# Altium PCB OPAMP_TESTERh.PcbDoc (part 1 of 2)
Units mil, origin at the board's own origin, x right, y up, seen from the top; angles counter-clockwise.
Board outline 10340.03 x 6170.03 mil, 2 copper layers (Top Layer, Bottom Layer); 210 components, 0 nets, 1610 pads, 0 vias.
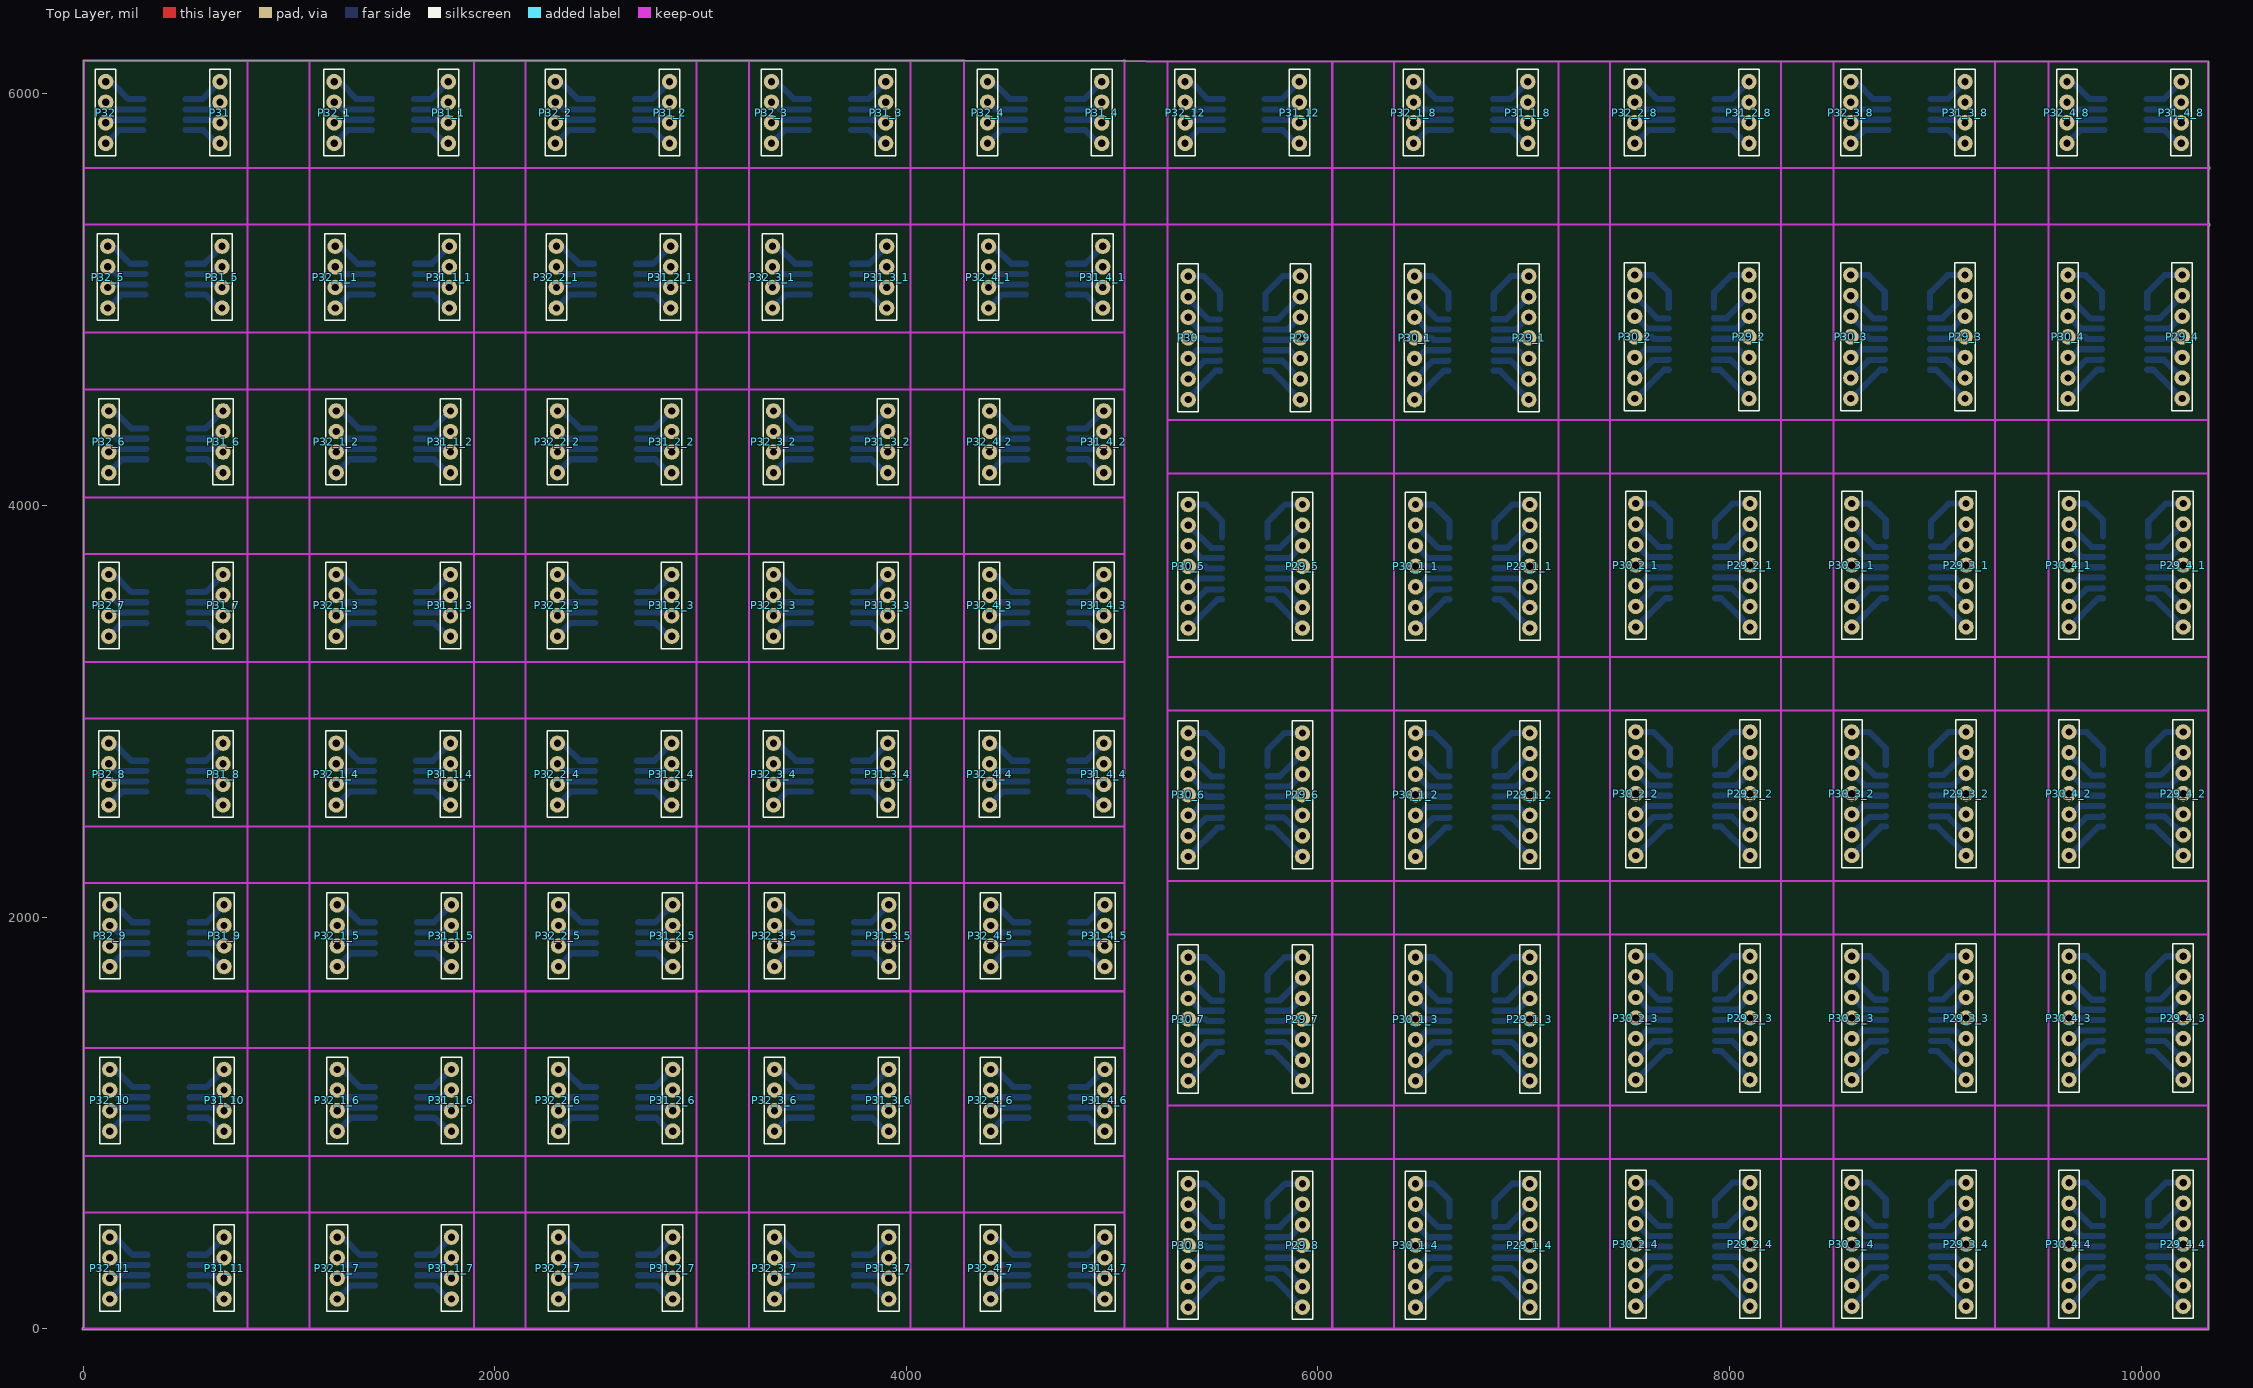
[diagram p0: Top Layer view]
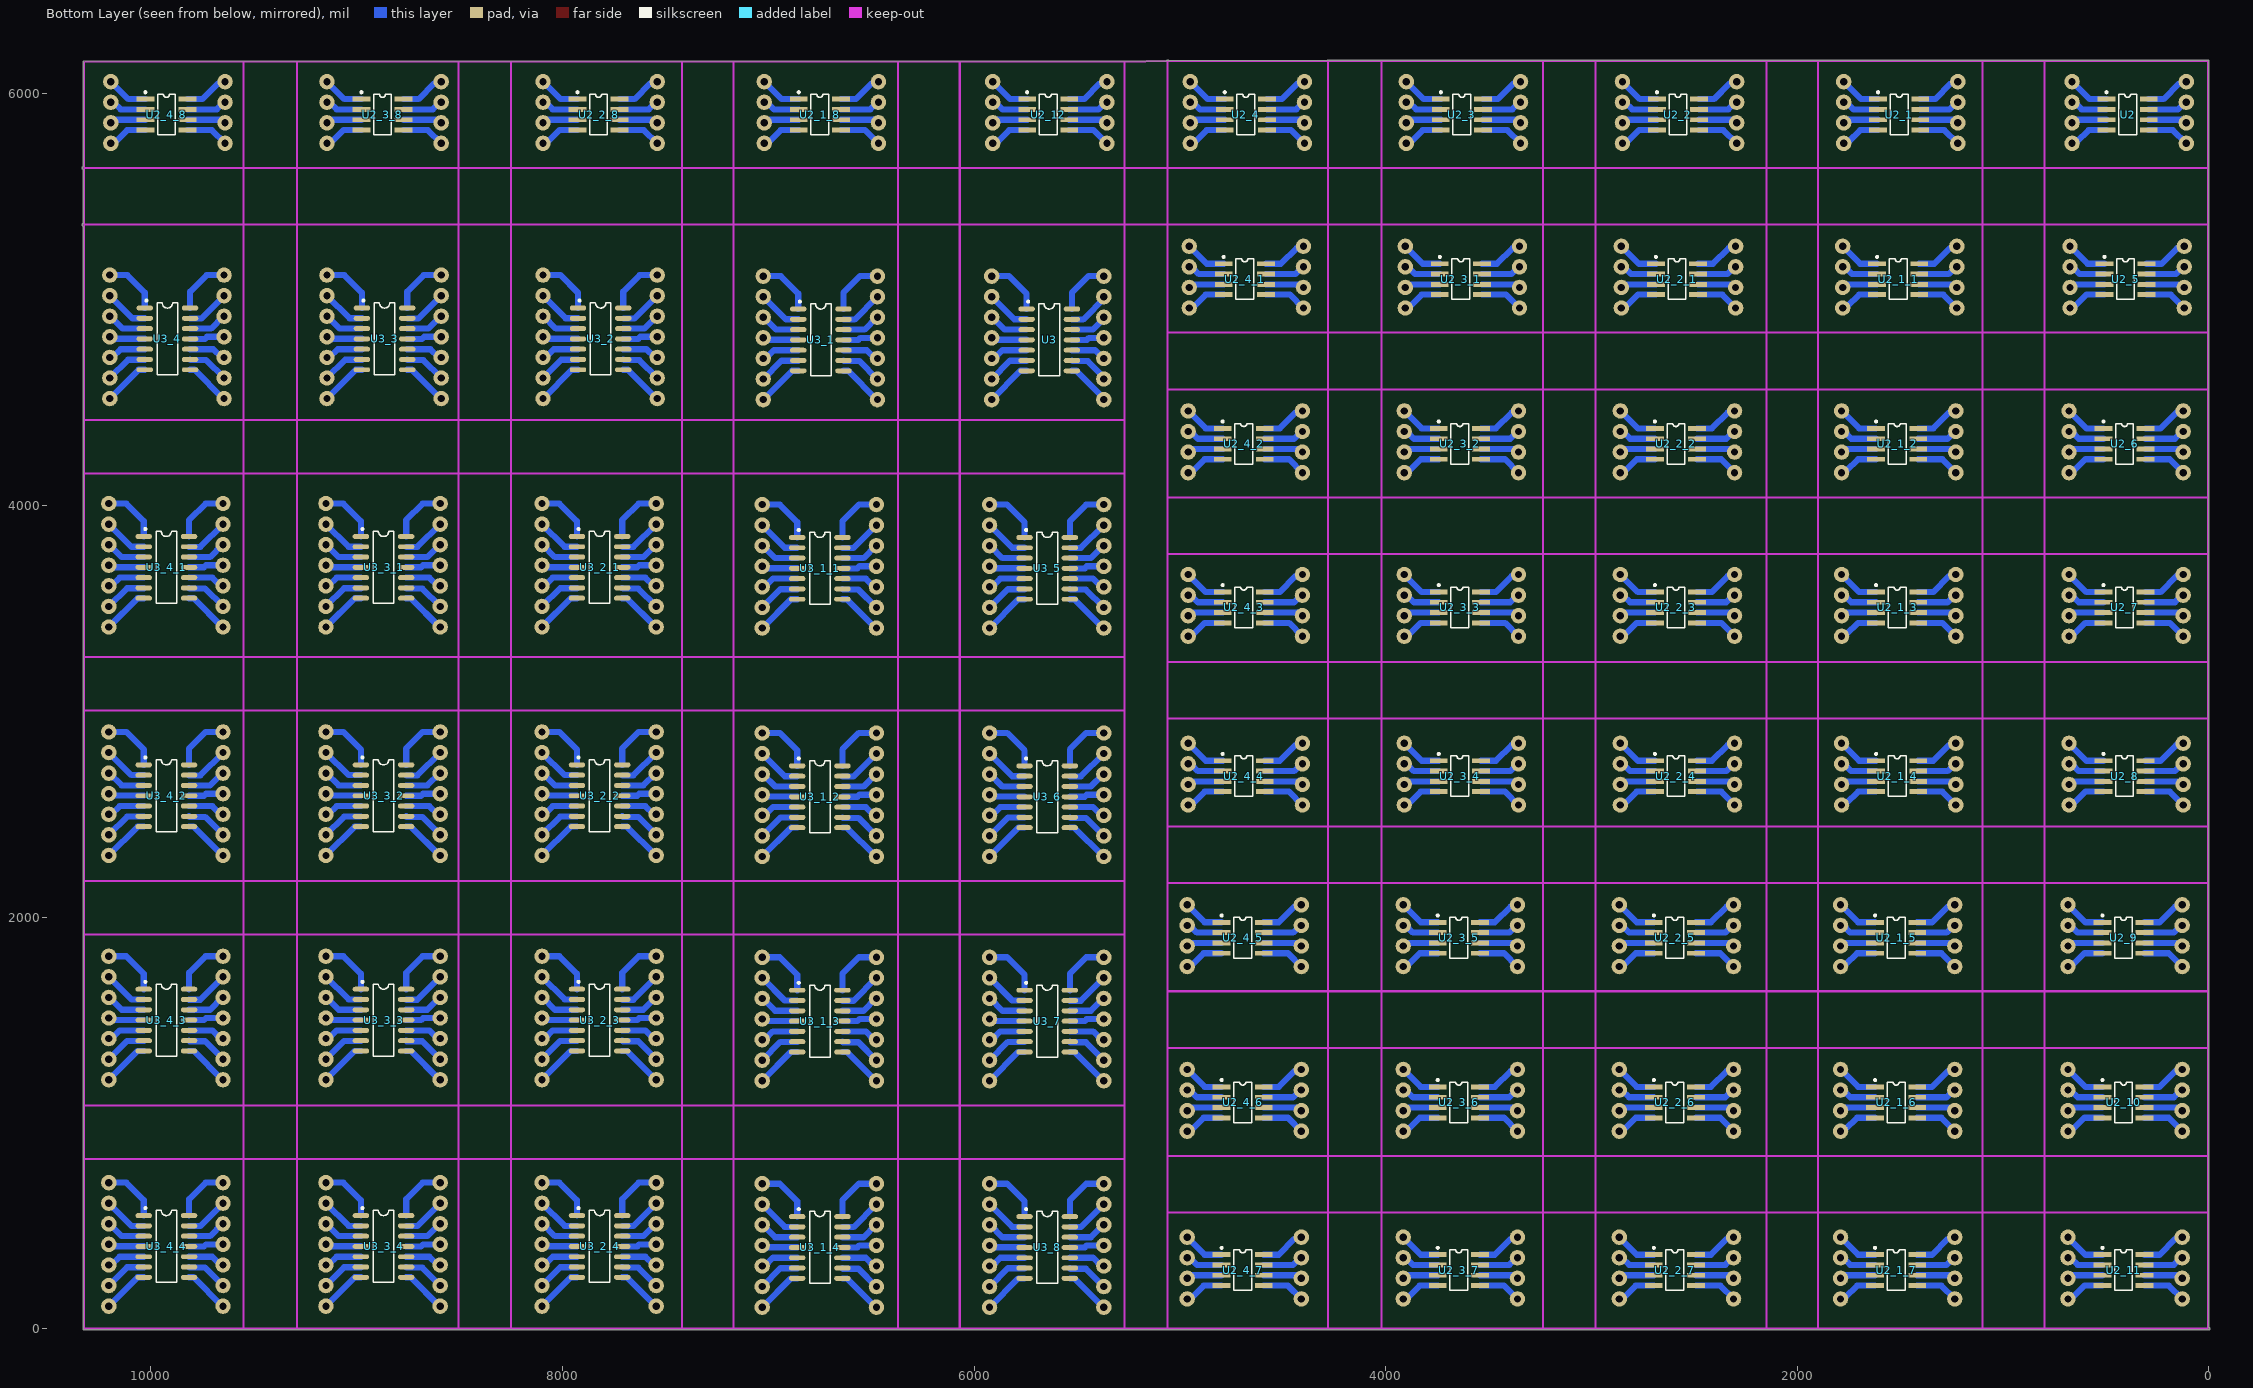
[diagram p1: Bottom Layer view, seen from below]

## Layer stack, top to bottom
Top Solder: solder mask 0.4, Solder Resist, Dk 3.5
Top Layer: signal copper 1.4
Dielectric 1: dielectric 12.6, FR-4, Dk 4.8
Bottom Layer: signal copper 1.4
Bottom Solder: solder mask 0.4, Solder Resist, Dk 3.5

## Board outline
-0.01,5.01 ccw(c0,0) 0,-5.02 10325,-5.02 ccw(c10325,0) 10330.02,0 10330.01,5359.99 ccw(c10330,5365) 10335.01,5365 ccw(c10330,5365) 10330.01,5370.02 10330.01,5634.99 ccw(c10330,5640) 10335.01,5640 ccw(c10330,5640) 10330.01,5645.02 10330.01,6154.98 ccw(c10325,6154.98) 10325,6160 5064.31,6162.56 ccw(c5060,6160) 5055.69,6162.56 4284.07,6162.93 ccw(c4280,6160) 4275.93,6162.94 4023.97,6163.06 ccw(c4020,6160) 4016.03,6163.06 3238.65,6163.44 ccw(c3235,6160) 3231.36,6163.45 2983.52,6163.57 ccw(c2980,6160) 2976.48,6163.57 2153.06,6163.97 ccw(c2150,6160) 2146.94,6163.97 1902.9,6164.09 ccw(c1900,6160) 1897.1,6164.1 1102.25,6164.48 1097.75,6164.48 801.93,6164.63 798.07,6164.63 5.03,6165.01 ccw(c5,6160) -0.02,6160

## Design rules (kind name [scope] priority, off if disabled: settings)
Clearance [All] p1: gap=10 ignorepadtopadclearanceinfootprint=FALSE except(0: Arc-Hole Track-Hole SMDPad-Hole THPad-Hole Via-Hole Fill-Hole Poly-Hole Region-Hole Text-Hole)
PolygonConnect [All] p1: connectstyle=Relief reliefconductorwidth=10 reliefentries=4 polygonreliefangle="90 Angle" airgapwidth=10
RoutingVias [All] p1: holewidth=28 width=50 viastyle="Through Hole" minholewidth=28 minwidth=50 maxholewidth=28 maxwidth=50
SolderMaskExpansion [All] p1: expansion=4 istentingtop=FALSE
Width [All] p1: maxlimit=10 minlimit=10 preferedwidth=10
30 further rules are at their usual default settings.

## Components (designator, comment, footprint, x,y, rotation, side; value= is the part's Value field where it differs from the comment)
P29 "LM324" "CON HDR 2.54FM 7" 5915,5115 r270 top locked
P29_1 "LM324" "CON HDR 2.54FM 7" 7025,5115 r270 top locked (schematic designator P29)
P29_1_1 "LM324" "CON HDR 2.54FM 7" 7030,4005 r270 top locked (schematic designator P29)
P29_1_2 "LM324" "CON HDR 2.54FM 7" 7030,2895 r270 top locked (schematic designator P29)
P29_1_3 "LM324" "CON HDR 2.54FM 7" 7030,1805 r270 top locked (schematic designator P29)
P29_1_4 "LM324" "CON HDR 2.54FM 7" 7030,705 r270 top locked (schematic designator P29)
P29_2 "LM324" "CON HDR 2.54FM 7" 8095,5120 r270 top locked (schematic designator P29)
P29_2_1 "LM324" "CON HDR 2.54FM 7" 8100,4010 r270 top locked (schematic designator P29)
P29_2_2 "LM324" "CON HDR 2.54FM 7" 8100,2900 r270 top locked (schematic designator P29)
P29_2_3 "LM324" "CON HDR 2.54FM 7" 8100,1810 r270 top locked (schematic designator P29)
P29_2_4 "LM324" "CON HDR 2.54FM 7" 8100,710 r270 top locked (schematic designator P29)
P29_3 "LM324" "CON HDR 2.54FM 7" 9145,5120 r270 top locked (schematic designator P29)
P29_3_1 "LM324" "CON HDR 2.54FM 7" 9150,4010 r270 top locked (schematic designator P29)
P29_3_2 "LM324" "CON HDR 2.54FM 7" 9150,2900 r270 top locked (schematic designator P29)
P29_3_3 "LM324" "CON HDR 2.54FM 7" 9150,1810 r270 top locked (schematic designator P29)
P29_3_4 "LM324" "CON HDR 2.54FM 7" 9150,710 r270 top locked (schematic designator P29)
P29_4 "LM324" "CON HDR 2.54FM 7" 10200,5120 r270 top locked (schematic designator P29)
P29_4_1 "LM324" "CON HDR 2.54FM 7" 10205,4010 r270 top locked (schematic designator P29)
P29_4_2 "LM324" "CON HDR 2.54FM 7" 10205,2900 r270 top locked (schematic designator P29)
P29_4_3 "LM324" "CON HDR 2.54FM 7" 10205,1810 r270 top locked (schematic designator P29)
P29_4_4 "LM324" "CON HDR 2.54FM 7" 10205,710 r270 top locked (schematic designator P29)
P29_5 "LM324" "CON HDR 2.54FM 7" 5925,4005 r270 top locked (schematic designator P29)
P29_6 "LM324" "CON HDR 2.54FM 7" 5925,2895 r270 top locked (schematic designator P29)
P29_7 "LM324" "CON HDR 2.54FM 7" 5925,1805 r270 top locked (schematic designator P29)
P29_8 "LM324" "CON HDR 2.54FM 7" 5925,705 r270 top locked (schematic designator P29)
P30 "LM324" "CON HDR 2.54FM 7" 5370,4515 r90 top locked
P30_1 "LM324" "CON HDR 2.54FM 7" 6470,4515 r90 top locked (schematic designator P30)
P30_1_1 "LM324" "CON HDR 2.54FM 7" 6475,3405 r90 top locked (schematic designator P30)
P30_1_2 "LM324" "CON HDR 2.54FM 7" 6475,2295 r90 top locked (schematic designator P30)
P30_1_3 "LM324" "CON HDR 2.54FM 7" 6475,1205 r90 top locked (schematic designator P30)
P30_1_4 "LM324" "CON HDR 2.54FM 7" 6475,105 r90 top locked (schematic designator P30)
P30_2 "LM324" "CON HDR 2.54FM 7" 7540,4520 r90 top locked (schematic designator P30)
P30_2_1 "LM324" "CON HDR 2.54FM 7" 7545,3410 r90 top locked (schematic designator P30)
P30_2_2 "LM324" "CON HDR 2.54FM 7" 7545,2300 r90 top locked (schematic designator P30)
P30_2_3 "LM324" "CON HDR 2.54FM 7" 7545,1210 r90 top locked (schematic designator P30)
P30_2_4 "LM324" "CON HDR 2.54FM 7" 7545,110 r90 top locked (schematic designator P30)
P30_3 "LM324" "CON HDR 2.54FM 7" 8590,4520 r90 top locked (schematic designator P30)
P30_3_1 "LM324" "CON HDR 2.54FM 7" 8595,3410 r90 top locked (schematic designator P30)
P30_3_2 "LM324" "CON HDR 2.54FM 7" 8595,2300 r90 top locked (schematic designator P30)
P30_3_3 "LM324" "CON HDR 2.54FM 7" 8595,1210 r90 top locked (schematic designator P30)
P30_3_4 "LM324" "CON HDR 2.54FM 7" 8595,110 r90 top locked (schematic designator P30)
P30_4 "LM324" "CON HDR 2.54FM 7" 9645,4520 r90 top locked (schematic designator P30)
P30_4_1 "LM324" "CON HDR 2.54FM 7" 9650,3410 r90 top locked (schematic designator P30)
P30_4_2 "LM324" "CON HDR 2.54FM 7" 9650,2300 r90 top locked (schematic designator P30)
P30_4_3 "LM324" "CON HDR 2.54FM 7" 9650,1210 r90 top locked (schematic designator P30)
P30_4_4 "LM324" "CON HDR 2.54FM 7" 9650,110 r90 top locked (schematic designator P30)
P30_5 "LM324" "CON HDR 2.54FM 7" 5370,3405 r90 top locked (schematic designator P30)
P30_6 "LM324" "CON HDR 2.54FM 7" 5370,2295 r90 top locked (schematic designator P30)
P30_7 "LM324" "CON HDR 2.54FM 7" 5370,1205 r90 top locked (schematic designator P30)
P30_8 "LM324" "CON HDR 2.54FM 7" 5370,105 r90 top locked (schematic designator P30)
P31 "LM358" "CON HDR 2.54FM 4" 665,6060 r270 top locked
P31_1 "LM358" "CON HDR 2.54FM 4" 1775,6060 r270 top locked (schematic designator P31)
P31_1_1 "LM358" "CON HDR 2.54FM 4" 1780,5260 r270 top locked (schematic designator P31)
P31_1_2 "LM358" "CON HDR 2.54FM 4" 1785,4460 r270 top locked (schematic designator P31)
P31_1_3 "LM358" "CON HDR 2.54FM 4" 1785,3665 r270 top locked (schematic designator P31)
P31_1_4 "LM358" "CON HDR 2.54FM 4" 1785,2845 r270 top locked (schematic designator P31)
P31_1_5 "LM358" "CON HDR 2.54FM 4" 1790,2060 r270 top locked (schematic designator P31)
P31_1_6 "LM358" "CON HDR 2.54FM 4" 1790,1260 r270 top locked (schematic designator P31)
P31_1_7 "LM358" "CON HDR 2.54FM 4" 1790,445 r270 top locked (schematic designator P31)
P31_1_8 "LM358" "CON HDR 2.54FM 4" 7020,6060 r270 top locked (schematic designator P31)
P31_2 "LM358" "CON HDR 2.54FM 4" 2850,6060 r270 top locked (schematic designator P31)
P31_2_1 "LM358" "CON HDR 2.54FM 4" 2855,5260 r270 top locked (schematic designator P31)
P31_2_2 "LM358" "CON HDR 2.54FM 4" 2860,4460 r270 top locked (schematic designator P31)
P31_2_3 "LM358" "CON HDR 2.54FM 4" 2860,3665 r270 top locked (schematic designator P31)
P31_2_4 "LM358" "CON HDR 2.54FM 4" 2860,2845 r270 top locked (schematic designator P31)
P31_2_5 "LM358" "CON HDR 2.54FM 4" 2865,2060 r270 top locked (schematic designator P31)
P31_2_6 "LM358" "CON HDR 2.54FM 4" 2865,1260 r270 top locked (schematic designator P31)
P31_2_7 "LM358" "CON HDR 2.54FM 4" 2865,445 r270 top locked (schematic designator P31)
P31_2_8 "LM358" "CON HDR 2.54FM 4" 8095,6060 r270 top locked (schematic designator P31)
P31_3 "LM358" "CON HDR 2.54FM 4" 3900,6060 r270 top locked (schematic designator P31)
P31_3_1 "LM358" "CON HDR 2.54FM 4" 3905,5260 r270 top locked (schematic designator P31)
P31_3_2 "LM358" "CON HDR 2.54FM 4" 3910,4460 r270 top locked (schematic designator P31)
P31_3_3 "LM358" "CON HDR 2.54FM 4" 3910,3665 r270 top locked (schematic designator P31)
P31_3_4 "LM358" "CON HDR 2.54FM 4" 3910,2845 r270 top locked (schematic designator P31)
P31_3_5 "LM358" "CON HDR 2.54FM 4" 3915,2060 r270 top locked (schematic designator P31)
P31_3_6 "LM358" "CON HDR 2.54FM 4" 3915,1260 r270 top locked (schematic designator P31)
P31_3_7 "LM358" "CON HDR 2.54FM 4" 3915,445 r270 top locked (schematic designator P31)
P31_3_8 "LM358" "CON HDR 2.54FM 4" 9145,6060 r270 top locked (schematic designator P31)
P31_4 "LM358" "CON HDR 2.54FM 4" 4950,6060 r270 top locked (schematic designator P31)
P31_4_1 "LM358" "CON HDR 2.54FM 4" 4955,5260 r270 top locked (schematic designator P31)
P31_4_2 "LM358" "CON HDR 2.54FM 4" 4960,4460 r270 top locked (schematic designator P31)
P31_4_3 "LM358" "CON HDR 2.54FM 4" 4960,3665 r270 top locked (schematic designator P31)
P31_4_4 "LM358" "CON HDR 2.54FM 4" 4960,2845 r270 top locked (schematic designator P31)
P31_4_5 "LM358" "CON HDR 2.54FM 4" 4965,2060 r270 top locked (schematic designator P31)
P31_4_6 "LM358" "CON HDR 2.54FM 4" 4965,1260 r270 top locked (schematic designator P31)
P31_4_7 "LM358" "CON HDR 2.54FM 4" 4965,445 r270 top locked (schematic designator P31)
P31_4_8 "LM358" "CON HDR 2.54FM 4" 10195,6060 r270 top locked (schematic designator P31)
P31_5 "LM358" "CON HDR 2.54FM 4" 675,5260 r270 top locked (schematic designator P31)
P31_6 "LM358" "CON HDR 2.54FM 4" 680,4460 r270 top locked (schematic designator P31)
P31_7 "LM358" "CON HDR 2.54FM 4" 680,3665 r270 top locked (schematic designator P31)
P31_8 "LM358" "CON HDR 2.54FM 4" 680,2845 r270 top locked (schematic designator P31)
P31_9 "LM358" "CON HDR 2.54FM 4" 685,2060 r270 top locked (schematic designator P31)
P31_10 "LM358" "CON HDR 2.54FM 4" 685,1260 r270 top locked (schematic designator P31)
P31_11 "LM358" "CON HDR 2.54FM 4" 685,445 r270 top locked (schematic designator P31)
P31_12 "LM358" "CON HDR 2.54FM 4" 5910,6060 r270 top locked (schematic designator P31)
P32 "LM358" "CON HDR 2.54FM 4" 110,5760 r90 top locked
P32_1 "LM358" "CON HDR 2.54FM 4" 1220,5760 r90 top locked (schematic designator P32)
P32_1_1 "LM358" "CON HDR 2.54FM 4" 1225,4960 r90 top locked (schematic designator P32)
P32_1_2 "LM358" "CON HDR 2.54FM 4" 1230,4160 r90 top locked (schematic designator P32)
P32_1_3 "LM358" "CON HDR 2.54FM 4" 1230,3365 r90 top locked (schematic designator P32)
P32_1_4 "LM358" "CON HDR 2.54FM 4" 1230,2545 r90 top locked (schematic designator P32)
P32_1_5 "LM358" "CON HDR 2.54FM 4" 1235,1760 r90 top locked (schematic designator P32)
P32_1_6 "LM358" "CON HDR 2.54FM 4" 1235,960 r90 top locked (schematic designator P32)
P32_1_7 "LM358" "CON HDR 2.54FM 4" 1235,145 r90 top locked (schematic designator P32)
P32_1_8 "LM358" "CON HDR 2.54FM 4" 6465,5760 r90 top locked (schematic designator P32)
P32_2 "LM358" "CON HDR 2.54FM 4" 2295,5760 r90 top locked (schematic designator P32)
P32_2_1 "LM358" "CON HDR 2.54FM 4" 2300,4960 r90 top locked (schematic designator P32)
P32_2_2 "LM358" "CON HDR 2.54FM 4" 2305,4160 r90 top locked (schematic designator P32)
P32_2_3 "LM358" "CON HDR 2.54FM 4" 2305,3365 r90 top locked (schematic designator P32)
P32_2_4 "LM358" "CON HDR 2.54FM 4" 2305,2545 r90 top locked (schematic designator P32)
P32_2_5 "LM358" "CON HDR 2.54FM 4" 2310,1760 r90 top locked (schematic designator P32)
P32_2_6 "LM358" "CON HDR 2.54FM 4" 2310,960 r90 top locked (schematic designator P32)
P32_2_7 "LM358" "CON HDR 2.54FM 4" 2310,145 r90 top locked (schematic designator P32)
P32_2_8 "LM358" "CON HDR 2.54FM 4" 7540,5760 r90 top locked (schematic designator P32)
P32_3 "LM358" "CON HDR 2.54FM 4" 3345,5760 r90 top locked (schematic designator P32)
P32_3_1 "LM358" "CON HDR 2.54FM 4" 3350,4960 r90 top locked (schematic designator P32)
P32_3_2 "LM358" "CON HDR 2.54FM 4" 3355,4160 r90 top locked (schematic designator P32)
P32_3_3 "LM358" "CON HDR 2.54FM 4" 3355,3365 r90 top locked (schematic designator P32)
P32_3_4 "LM358" "CON HDR 2.54FM 4" 3355,2545 r90 top locked (schematic designator P32)
P32_3_5 "LM358" "CON HDR 2.54FM 4" 3360,1760 r90 top locked (schematic designator P32)
P32_3_6 "LM358" "CON HDR 2.54FM 4" 3360,960 r90 top locked (schematic designator P32)
P32_3_7 "LM358" "CON HDR 2.54FM 4" 3360,145 r90 top locked (schematic designator P32)
P32_3_8 "LM358" "CON HDR 2.54FM 4" 8590,5760 r90 top locked (schematic designator P32)
P32_4 "LM358" "CON HDR 2.54FM 4" 4395,5760 r90 top locked (schematic designator P32)
P32_4_1 "LM358" "CON HDR 2.54FM 4" 4400,4960 r90 top locked (schematic designator P32)
P32_4_2 "LM358" "CON HDR 2.54FM 4" 4405,4160 r90 top locked (schematic designator P32)
P32_4_3 "LM358" "CON HDR 2.54FM 4" 4405,3365 r90 top locked (schematic designator P32)
P32_4_4 "LM358" "CON HDR 2.54FM 4" 4405,2545 r90 top locked (schematic designator P32)
P32_4_5 "LM358" "CON HDR 2.54FM 4" 4410,1760 r90 top locked (schematic designator P32)
P32_4_6 "LM358" "CON HDR 2.54FM 4" 4410,960 r90 top locked (schematic designator P32)
P32_4_7 "LM358" "CON HDR 2.54FM 4" 4410,145 r90 top locked (schematic designator P32)
P32_4_8 "LM358" "CON HDR 2.54FM 4" 9640,5760 r90 top locked (schematic designator P32)
P32_5 "LM358" "CON HDR 2.54FM 4" 120,4960 r90 top locked (schematic designator P32)
P32_6 "LM358" "CON HDR 2.54FM 4" 125,4160 r90 top locked (schematic designator P32)
P32_7 "LM358" "CON HDR 2.54FM 4" 125,3365 r90 top locked (schematic designator P32)
P32_8 "LM358" "CON HDR 2.54FM 4" 125,2545 r90 top locked (schematic designator P32)
P32_9 "LM358" "CON HDR 2.54FM 4" 130,1760 r90 top locked (schematic designator P32)
P32_10 "LM358" "CON HDR 2.54FM 4" 130,960 r90 top locked (schematic designator P32)
P32_11 "LM358" "CON HDR 2.54FM 4" 130,145 r90 top locked (schematic designator P32)
P32_12 "LM358" "CON HDR 2.54FM 4" 5355,5760 r90 top locked (schematic designator P32)
U2 "IC LM358" "SMD IC SOP8" 395,5900 r270 bottom locked
U2_1 "IC LM358" "SMD IC SOP8" 1505,5900 r270 bottom locked (schematic designator U2)
U2_1_1 "IC LM358" "SMD IC SOP8" 1510,5100 r270 bottom locked (schematic designator U2)
U2_1_2 "IC LM358" "SMD IC SOP8" 1515,4300 r270 bottom locked (schematic designator U2)
U2_1_3 "IC LM358" "SMD IC SOP8" 1515,3505 r270 bottom locked (schematic designator U2)
U2_1_4 "IC LM358" "SMD IC SOP8" 1515,2685 r270 bottom locked (schematic designator U2)
U2_1_5 "IC LM358" "SMD IC SOP8" 1520,1900 r270 bottom locked (schematic designator U2)
U2_1_6 "IC LM358" "SMD IC SOP8" 1520,1100 r270 bottom locked (schematic designator U2)
U2_1_7 "IC LM358" "SMD IC SOP8" 1520,285 r270 bottom locked (schematic designator U2)
U2_1_8 "IC LM358" "SMD IC SOP8" 6750,5900 r270 bottom locked (schematic designator U2)
U2_2 "IC LM358" "SMD IC SOP8" 2580,5900 r270 bottom locked (schematic designator U2)
U2_2_1 "IC LM358" "SMD IC SOP8" 2585,5100 r270 bottom locked (schematic designator U2)
U2_2_2 "IC LM358" "SMD IC SOP8" 2590,4300 r270 bottom locked (schematic designator U2)
U2_2_3 "IC LM358" "SMD IC SOP8" 2590,3505 r270 bottom locked (schematic designator U2)
U2_2_4 "IC LM358" "SMD IC SOP8" 2590,2685 r270 bottom locked (schematic designator U2)
U2_2_5 "IC LM358" "SMD IC SOP8" 2595,1900 r270 bottom locked (schematic designator U2)
U2_2_6 "IC LM358" "SMD IC SOP8" 2595,1100 r270 bottom locked (schematic designator U2)
U2_2_7 "IC LM358" "SMD IC SOP8" 2595,285 r270 bottom locked (schematic designator U2)
U2_2_8 "IC LM358" "SMD IC SOP8" 7825,5900 r270 bottom locked (schematic designator U2)
U2_3 "IC LM358" "SMD IC SOP8" 3630,5900 r270 bottom locked (schematic designator U2)
U2_3_1 "IC LM358" "SMD IC SOP8" 3635,5100 r270 bottom locked (schematic designator U2)
U2_3_2 "IC LM358" "SMD IC SOP8" 3640,4300 r270 bottom locked (schematic designator U2)
U2_3_3 "IC LM358" "SMD IC SOP8" 3640,3505 r270 bottom locked (schematic designator U2)
U2_3_4 "IC LM358" "SMD IC SOP8" 3640,2685 r270 bottom locked (schematic designator U2)
U2_3_5 "IC LM358" "SMD IC SOP8" 3645,1900 r270 bottom locked (schematic designator U2)
U2_3_6 "IC LM358" "SMD IC SOP8" 3645,1100 r270 bottom locked (schematic designator U2)
U2_3_7 "IC LM358" "SMD IC SOP8" 3645,285 r270 bottom locked (schematic designator U2)
U2_3_8 "IC LM358" "SMD IC SOP8" 8875,5900 r270 bottom locked (schematic designator U2)
U2_4 "IC LM358" "SMD IC SOP8" 4680,5900 r270 bottom locked (schematic designator U2)
U2_4_1 "IC LM358" "SMD IC SOP8" 4685,5100 r270 bottom locked (schematic designator U2)
U2_4_2 "IC LM358" "SMD IC SOP8" 4690,4300 r270 bottom locked (schematic designator U2)
U2_4_3 "IC LM358" "SMD IC SOP8" 4690,3505 r270 bottom locked (schematic designator U2)
U2_4_4 "IC LM358" "SMD IC SOP8" 4690,2685 r270 bottom locked (schematic designator U2)
U2_4_5 "IC LM358" "SMD IC SOP8" 4695,1900 r270 bottom locked (schematic designator U2)
U2_4_6 "IC LM358" "SMD IC SOP8" 4695,1100 r270 bottom locked (schematic designator U2)
U2_4_7 "IC LM358" "SMD IC SOP8" 4695,285 r270 bottom locked (schematic designator U2)
U2_4_8 "IC LM358" "SMD IC SOP8" 9925,5900 r270 bottom locked (schematic designator U2)
U2_5 "IC LM358" "SMD IC SOP8" 405,5100 r270 bottom locked (schematic designator U2)
U2_6 "IC LM358" "SMD IC SOP8" 410,4300 r270 bottom locked (schematic designator U2)
U2_7 "IC LM358" "SMD IC SOP8" 410,3505 r270 bottom locked (schematic designator U2)
U2_8 "IC LM358" "SMD IC SOP8" 410,2685 r270 bottom locked (schematic designator U2)
U2_9 "IC LM358" "SMD IC SOP8" 415,1900 r270 bottom locked (schematic designator U2)
U2_10 "IC LM358" "SMD IC SOP8" 415,1100 r270 bottom locked (schematic designator U2)
U2_11 "IC LM358" "SMD IC SOP8" 415,285 r270 bottom locked (schematic designator U2)
U2_12 "IC LM358" "SMD IC SOP8" 5640,5900 r270 bottom locked (schematic designator U2)
U3 "IC LM324" "SMD IC SOP14" 5635,4805 r270 bottom locked
U3_1 "IC LM324" "SMD IC SOP14" 6745,4805 r270 bottom locked (schematic designator U3)
U3_1_1 "IC LM324" "SMD IC SOP14" 6750,3695 r270 bottom locked (schematic designator U3)
U3_1_2 "IC LM324" "SMD IC SOP14" 6750,2585 r270 bottom locked (schematic designator U3)
U3_1_3 "IC LM324" "SMD IC SOP14" 6750,1495 r270 bottom locked (schematic designator U3)
U3_1_4 "IC LM324" "SMD IC SOP14" 6750,395 r270 bottom locked (schematic designator U3)
U3_2 "IC LM324" "SMD IC SOP14" 7815,4810 r270 bottom locked (schematic designator U3)
U3_2_1 "IC LM324" "SMD IC SOP14" 7820,3700 r270 bottom locked (schematic designator U3)
U3_2_2 "IC LM324" "SMD IC SOP14" 7820,2590 r270 bottom locked (schematic designator U3)
U3_2_3 "IC LM324" "SMD IC SOP14" 7820,1500 r270 bottom locked (schematic designator U3)
U3_2_4 "IC LM324" "SMD IC SOP14" 7820,400 r270 bottom locked (schematic designator U3)
U3_3 "IC LM324" "SMD IC SOP14" 8865,4810 r270 bottom locked (schematic designator U3)
U3_3_1 "IC LM324" "SMD IC SOP14" 8870,3700 r270 bottom locked (schematic designator U3)
U3_3_2 "IC LM324" "SMD IC SOP14" 8870,2590 r270 bottom locked (schematic designator U3)
U3_3_3 "IC LM324" "SMD IC SOP14" 8870,1500 r270 bottom locked (schematic designator U3)
U3_3_4 "IC LM324" "SMD IC SOP14" 8870,400 r270 bottom locked (schematic designator U3)
U3_4 "IC LM324" "SMD IC SOP14" 9920,4810 r270 bottom locked (schematic designator U3)
U3_4_1 "IC LM324" "SMD IC SOP14" 9925,3700 r270 bottom locked (schematic designator U3)
U3_4_2 "IC LM324" "SMD IC SOP14" 9925,2590 r270 bottom locked (schematic designator U3)
U3_4_3 "IC LM324" "SMD IC SOP14" 9925,1500 r270 bottom locked (schematic designator U3)
U3_4_4 "IC LM324" "SMD IC SOP14" 9925,400 r270 bottom locked (schematic designator U3)
U3_5 "IC LM324" "SMD IC SOP14" 5645,3695 r270 bottom locked (schematic designator U3)
U3_6 "IC LM324" "SMD IC SOP14" 5645,2585 r270 bottom locked (schematic designator U3)
U3_7 "IC LM324" "SMD IC SOP14" 5645,1495 r270 bottom locked (schematic designator U3)
U3_8 "IC LM324" "SMD IC SOP14" 5645,395 r270 bottom locked (schematic designator U3)

## Footprints (in the part's own frame and the unit in brackets; to place one, negate y for a bottom-side part, rotate by r counter-clockwise, add the part's x,y. Pads: shape width x height; smd on the part's side, far side on the other; paste and mask are expansions set on the pad)
"CON HDR 2.54FM 4" [mm] "CONNECTOR PTCH:2.54MM"
  round 1.905 hole 0.9: 1(0,0) 2(2.54,0) 3(5.08,0) 4(7.62,0)
  silkscreen extent -1.52,-1.27 9.14,1.27, body extent -1.5,-1.24 9.16,1.26, height 5
"CON HDR 2.54FM 7" [mm] "CONNECTOR PTCH:2.54MM"
  round 1.905 hole 0.9: 1(0,0) 2(2.54,0) 3(5.08,0) 4(7.62,0) 5(10.16,0) 6(12.7,0) 7(15.24,0)
  silkscreen extent -1.52,-1.27 16.76,1.27, body extent -1.54,-1.24 16.74,1.26, height 5
"SMD IC SOP8" [mm] "SOP, 8-Leads , Pitch 1.27mm"
  rect 0.6x2.2 smd: 1(-1.905,-2.6) 2(-0.635,-2.6) 3(0.635,-2.6) 4(1.905,-2.6) 5(1.905,2.6) 6(0.635,2.6) 7(-0.635,2.6) 8(-1.905,2.6)
  round 1.5 on Mech2: 4(-1.3,0) 4(1.3,0)
  silkscreen extent -2.88,-2.72 2.5,1.1, body extent -2.5,-3.1 2.5,3.1, height 1.75
"SMD IC SOP14" [mil] "SOP, 14-Leads , Pitch 1.27mm"
  oval 24x80 smd: 1(-150,-110) 2(-100,-110) 3(-50,-110) 4(0,-110) 5(50,-110) 6(100,-110) 7(150,-110) 8(150,110) 9(100,110) 10(50,110) 11(0,110) 12(-50,110) 13(-100,110) 14(-150,110)
  round 59.06 on Mech2: 5(-60,0) 5(60,0)
  oval 39.37x78.74 on Mech2: 6(-155,0) 6(155,0)
  silkscreen extent -191,-107 175,50, body extent -171,-121 171,121, height 70

## Part data
P29 P29_1 P29_1_1 P29_1_2 P29_1_3 P29_1_4 P29_2 P29_2_1 P29_2_2 P29_2_3 P29_2_4 P29_3 P29_3_1 P29_3_2 P29_3_3 P29_3_4 P29_4 P29_4_1 P29_4_2 P29_4_3 P29_4_4 P29_5 P29_6 P29_7 P29_8 P30 P30_1 P30_1_1 P30_1_2 P30_1_3 P30_1_4 P30_2 P30_2_1 P30_2_2 P30_2_3 P30_2_4 P30_3 P30_3_1 P30_3_2 P30_3_3 P30_3_4 P30_4 P30_4_1 P30_4_2 P30_4_3 P30_4_4 P30_5 P30_6 P30_7 P30_8: library part "CONNECTOR 7", "Header, 7-Pin", LatestRevisionDate=17-Jul-2002, LatestRevisionNote="Re-released for DXP Platform.", Publisher="Altium Limited"
P31 P31_1 P31_1_1 P31_1_2 P31_1_3 P31_1_4 P31_1_5 P31_1_6 P31_1_7 P31_1_8 P31_2 P31_2_1 P31_2_2 P31_2_3 P31_2_4 P31_2_5 P31_2_6 P31_2_7 P31_2_8 P31_3 P31_3_1 P31_3_2 P31_3_3 P31_3_4 P31_3_5 P31_3_6 P31_3_7 P31_3_8 P31_4 P31_4_1 P31_4_2 P31_4_3 P31_4_4 P31_4_5 P31_4_6 P31_4_7 P31_4_8 P31_5 P31_6 P31_7 P31_8 P31_9 P31_10 P31_11 P31_12 P32 P32_1 P32_1_1 P32_1_2 P32_1_3 P32_1_4 P32_1_5 P32_1_6 P32_1_7 P32_1_8 P32_2 P32_2_1 P32_2_2 P32_2_3 P32_2_4 P32_2_5 P32_2_6 P32_2_7 P32_2_8 P32_3 P32_3_1 P32_3_2 P32_3_3 P32_3_4 P32_3_5 P32_3_6 P32_3_7 P32_3_8 P32_4 P32_4_1 P32_4_2 P32_4_3 P32_4_4 P32_4_5 P32_4_6 P32_4_7 P32_4_8 P32_5 P32_6 P32_7 P32_8 P32_9 P32_10 P32_11 P32_12: library part "CONNECTOR 4", "Header, 4-Pin", LatestRevisionDate=17-Jul-2002, LatestRevisionNote="Re-released for DXP Platform.", Publisher="Altium Limited"

## Nets (pads, with @x,y where several pads share a name; then routed paths per layer and width w, separated by ;. In a path a pad name is that pad's centre, name@x,y a point inside that pad or via, vN(x,y) a via of type N, cw(c..) or ccw(c..) an arc to the next point about the centre after c; other vN are vias at no path point)
pads on no net: P29.1 P29.2 P29.3 P29.4 P29.5 P29.6 P29.7 P29_1.1 P29_1.2 P29_1.3 P29_1.4 P29_1.5 P29_1.6 P29_1.7 P29_1_1.1 P29_1_1.2 P29_1_1.3 P29_1_1.4 P29_1_1.5 P29_1_1.6 P29_1_1.7 P29_1_2.1 P29_1_2.2 P29_1_2.3 P29_1_2.4 P29_1_2.5 P29_1_2.6 P29_1_2.7 P29_1_3.1 P29_1_3.2 P29_1_3.3 P29_1_3.4 P29_1_3.5 P29_1_3.6 P29_1_3.7 P29_1_4.1 P29_1_4.2 P29_1_4.3 P29_1_4.4 P29_1_4.5 P29_1_4.6 P29_1_4.7 P29_2.1 P29_2.2 P29_2.3 P29_2.4 P29_2.5 P29_2.6 P29_2.7 P29_2_1.1 P29_2_1.2 P29_2_1.3 P29_2_1.4 P29_2_1.5 P29_2_1.6 P29_2_1.7 P29_2_2.1 P29_2_2.2 P29_2_2.3 P29_2_2.4 P29_2_2.5 P29_2_2.6 P29_2_2.7 P29_2_3.1 P29_2_3.2 P29_2_3.3 P29_2_3.4 P29_2_3.5 P29_2_3.6 P29_2_3.7 P29_2_4.1 P29_2_4.2 P29_2_4.3 P29_2_4.4 P29_2_4.5 P29_2_4.6 P29_2_4.7 P29_3.1 P29_3.2 P29_3.3 P29_3.4 P29_3.5 P29_3.6 P29_3.7 P29_3_1.1 P29_3_1.2 P29_3_1.3 P29_3_1.4 P29_3_1.5 P29_3_1.6 P29_3_1.7 P29_3_2.1 P29_3_2.2 P29_3_2.3 P29_3_2.4 P29_3_2.5 P29_3_2.6 P29_3_2.7 P29_3_3.1 P29_3_3.2 P29_3_3.3 P29_3_3.4 P29_3_3.5 P29_3_3.6 P29_3_3.7 P29_3_4.1 P29_3_4.2 P29_3_4.3 P29_3_4.4 P29_3_4.5 P29_3_4.6 P29_3_4.7 P29_4.1 P29_4.2 P29_4.3 P29_4.4 P29_4.5 P29_4.6 P29_4.7 P29_4_1.1 P29_4_1.2 P29_4_1.3 P29_4_1.4 P29_4_1.5 P29_4_1.6 P29_4_1.7 P29_4_2.1 P29_4_2.2 P29_4_2.3 P29_4_2.4 P29_4_2.5 P29_4_2.6 P29_4_2.7 P29_4_3.1 P29_4_3.2 P29_4_3.3 P29_4_3.4 P29_4_3.5 P29_4_3.6 P29_4_3.7 P29_4_4.1 P29_4_4.2 P29_4_4.3 P29_4_4.4 P29_4_4.5 P29_4_4.6 P29_4_4.7 P29_5.1 P29_5.2 P29_5.3 P29_5.4 P29_5.5 P29_5.6 P29_5.7 P29_6.1 P29_6.2 P29_6.3 P29_6.4 P29_6.5 P29_6.6 P29_6.7 P29_7.1 P29_7.2 P29_7.3 P29_7.4 P29_7.5 P29_7.6 P29_7.7 P29_8.1 P29_8.2 P29_8.3 P29_8.4 P29_8.5 P29_8.6 P29_8.7 P30.1 P30.2 P30.3 P30.4 P30.5 P30.6 P30.7 P30_1.1 P30_1.2 P30_1.3 P30_1.4 P30_1.5 P30_1.6 P30_1.7 P30_1_1.1 P30_1_1.2 P30_1_1.3 P30_1_1.4 P30_1_1.5 P30_1_1.6 P30_1_1.7 P30_1_2.1 P30_1_2.2 P30_1_2.3 P30_1_2.4 P30_1_2.5 P30_1_2.6 P30_1_2.7 P30_1_3.1 P30_1_3.2 P30_1_3.3 P30_1_3.4 P30_1_3.5 P30_1_3.6 P30_1_3.7 P30_1_4.1 P30_1_4.2 P30_1_4.3 P30_1_4.4 P30_1_4.5 P30_1_4.6 P30_1_4.7 P30_2.1 P30_2.2 P30_2.3 P30_2.4 P30_2.5 P30_2.6 P30_2.7 P30_2_1.1 P30_2_1.2 P30_2_1.3 P30_2_1.4 P30_2_1.5 P30_2_1.6 P30_2_1.7 P30_2_2.1 P30_2_2.2 P30_2_2.3 P30_2_2.4 P30_2_2.5 P30_2_2.6 P30_2_2.7 P30_2_3.1 P30_2_3.2 P30_2_3.3 P30_2_3.4 P30_2_3.5 P30_2_3.6 P30_2_3.7 P30_2_4.1 P30_2_4.2 P30_2_4.3 P30_2_4.4 P30_2_4.5 P30_2_4.6 P30_2_4.7 P30_3.1 P30_3.2 P30_3.3 P30_3.4 P30_3.5 P30_3.6 P30_3.7 P30_3_1.1 P30_3_1.2 P30_3_1.3 P30_3_1.4 P30_3_1.5 P30_3_1.6 P30_3_1.7 P30_3_2.1 P30_3_2.2 P30_3_2.3 P30_3_2.4 P30_3_2.5 P30_3_2.6 P30_3_2.7 P30_3_3.1 P30_3_3.2 P30_3_3.3 P30_3_3.4 P30_3_3.5 P30_3_3.6 P30_3_3.7 P30_3_4.1 P30_3_4.2 P30_3_4.3 P30_3_4.4 P30_3_4.5 P30_3_4.6 P30_3_4.7 P30_4.1 P30_4.2 P30_4.3 P30_4.4 P30_4.5 P30_4.6 P30_4.7 P30_4_1.1 P30_4_1.2 P30_4_1.3 P30_4_1.4 P30_4_1.5 P30_4_1.6 P30_4_1.7 P30_4_2.1 P30_4_2.2 P30_4_2.3 P30_4_2.4 P30_4_2.5 P30_4_2.6 P30_4_2.7 P30_4_3.1 P30_4_3.2 P30_4_3.3 P30_4_3.4 P30_4_3.5 P30_4_3.6 P30_4_3.7 P30_4_4.1 P30_4_4.2 P30_4_4.3 P30_4_4.4 P30_4_4.5 P30_4_4.6 P30_4_4.7 P30_5.1 P30_5.2 P30_5.3 P30_5.4 P30_5.5 P30_5.6 P30_5.7 P30_6.1 P30_6.2 P30_6.3 P30_6.4 P30_6.5 P30_6.6 P30_6.7 P30_7.1 P30_7.2 P30_7.3 P30_7.4 P30_7.5 P30_7.6 P30_7.7 P30_8.1 P30_8.2 P30_8.3 P30_8.4 P30_8.5 P30_8.6 P30_8.7 P31.1 P31.2 P31.3 P31.4 P31_1.1 P31_1.2 P31_1.3 P31_1.4 P31_1_1.1 P31_1_1.2 P31_1_1.3 P31_1_1.4 P31_1_2.1 P31_1_2.2 P31_1_2.3 P31_1_2.4 P31_1_3.1 P31_1_3.2 P31_1_3.3 P31_1_3.4 P31_1_4.1 P31_1_4.2 P31_1_4.3 P31_1_4.4 P31_1_5.1 P31_1_5.2 P31_1_5.3 P31_1_5.4 P31_1_6.1 P31_1_6.2 P31_1_6.3 P31_1_6.4 P31_1_7.1 P31_1_7.2 P31_1_7.3 P31_1_7.4 P31_1_8.1 P31_1_8.2 P31_1_8.3 P31_1_8.4 P31_2.1 P31_2.2 P31_2.3 P31_2.4 P31_2_1.1 P31_2_1.2 P31_2_1.3 P31_2_1.4 P31_2_2.1 P31_2_2.2 P31_2_2.3 P31_2_2.4 P31_2_3.1 P31_2_3.2 P31_2_3.3 P31_2_3.4 P31_2_4.1 P31_2_4.2 P31_2_4.3 P31_2_4.4 P31_2_5.1 P31_2_5.2 P31_2_5.3 P31_2_5.4 P31_2_6.1 P31_2_6.2 P31_2_6.3 P31_2_6.4 P31_2_7.1 P31_2_7.2 P31_2_7.3 P31_2_7.4 P31_2_8.1 P31_2_8.2 P31_2_8.3 P31_2_8.4 P31_3.1 P31_3.2 P31_3.3 P31_3.4 P31_3_1.1 P31_3_1.2 P31_3_1.3 P31_3_1.4 P31_3_2.1 P31_3_2.2 P31_3_2.3 P31_3_2.4 P31_3_3.1 P31_3_3.2 P31_3_3.3 P31_3_3.4 P31_3_4.1 P31_3_4.2 P31_3_4.3 P31_3_4.4 P31_3_5.1 P31_3_5.2 P31_3_5.3 P31_3_5.4 P31_3_6.1 P31_3_6.2 P31_3_6.3 P31_3_6.4 P31_3_7.1 P31_3_7.2 P31_3_7.3 P31_3_7.4 P31_3_8.1 P31_3_8.2 P31_3_8.3 P31_3_8.4 P31_4.1 P31_4.2 P31_4.3 P31_4.4 P31_4_1.1 P31_4_1.2 P31_4_1.3 P31_4_1.4 P31_4_2.1 P31_4_2.2 P31_4_2.3 P31_4_2.4 P31_4_3.1 P31_4_3.2 P31_4_3.3 P31_4_3.4 P31_4_4.1 P31_4_4.2 P31_4_4.3 P31_4_4.4 P31_4_5.1 P31_4_5.2 P31_4_5.3 P31_4_5.4 P31_4_6.1 P31_4_6.2 P31_4_6.3 P31_4_6.4 P31_4_7.1 P31_4_7.2 P31_4_7.3 P31_4_7.4 P31_4_8.1 P31_4_8.2 P31_4_8.3 P31_4_8.4 P31_5.1 P31_5.2 P31_5.3 P31_5.4 P31_6.1 P31_6.2 P31_6.3 P31_6.4 P31_7.1 P31_7.2 P31_7.3 P31_7.4 P31_8.1 P31_8.2 P31_8.3 P31_8.4 P31_9.1 P31_9.2 P31_9.3 P31_9.4 P31_10.1 P31_10.2 P31_10.3 P31_10.4 P31_11.1 P31_11.2 P31_11.3 P31_11.4 P31_12.1 P31_12.2 P31_12.3 P31_12.4 P32.1 P32.2 P32.3 P32.4 P32_1.1 P32_1.2 P32_1.3 P32_1.4 P32_1_1.1 P32_1_1.2 P32_1_1.3 P32_1_1.4 P32_1_2.1 P32_1_2.2 P32_1_2.3 P32_1_2.4 P32_1_3.1 P32_1_3.2 P32_1_3.3 P32_1_3.4 P32_1_4.1 P32_1_4.2 P32_1_4.3 P32_1_4.4 P32_1_5.1 P32_1_5.2 P32_1_5.3 P32_1_5.4 P32_1_6.1 P32_1_6.2 P32_1_6.3 P32_1_6.4 P32_1_7.1 P32_1_7.2 P32_1_7.3 P32_1_7.4 P32_1_8.1 P32_1_8.2 P32_1_8.3 P32_1_8.4 P32_2.1 P32_2.2 P32_2.3 P32_2.4 P32_2_1.1 P32_2_1.2 P32_2_1.3 P32_2_1.4 P32_2_2.1 P32_2_2.2 P32_2_2.3 P32_2_2.4 P32_2_3.1 P32_2_3.2 P32_2_3.3 P32_2_3.4 P32_2_4.1 P32_2_4.2 P32_2_4.3 P32_2_4.4 P32_2_5.1 P32_2_5.2 P32_2_5.3 P32_2_5.4 P32_2_6.1 P32_2_6.2 P32_2_6.3 P32_2_6.4 P32_2_7.1 P32_2_7.2 P32_2_7.3 P32_2_7.4 P32_2_8.1 P32_2_8.2 P32_2_8.3 P32_2_8.4 P32_3.1 P32_3.2 P32_3.3 P32_3.4 P32_3_1.1 P32_3_1.2 P32_3_1.3 P32_3_1.4 P32_3_2.1 P32_3_2.2 P32_3_2.3 P32_3_2.4 P32_3_3.1 P32_3_3.2 P32_3_3.3 P32_3_3.4 P32_3_4.1 P32_3_4.2 P32_3_4.3 P32_3_4.4 P32_3_5.1 P32_3_5.2 P32_3_5.3 P32_3_5.4 P32_3_6.1 P32_3_6.2 P32_3_6.3 P32_3_6.4 P32_3_7.1 P32_3_7.2 P32_3_7.3 P32_3_7.4 P32_3_8.1 P32_3_8.2 P32_3_8.3 P32_3_8.4 P32_4.1 P32_4.2 P32_4.3 P32_4.4 P32_4_1.1 P32_4_1.2 P32_4_1.3 P32_4_1.4 P32_4_2.1 P32_4_2.2 P32_4_2.3 P32_4_2.4 P32_4_3.1 P32_4_3.2 P32_4_3.3 P32_4_3.4 P32_4_4.1 P32_4_4.2 P32_4_4.3 P32_4_4.4 P32_4_5.1 P32_4_5.2 P32_4_5.3 P32_4_5.4 P32_4_6.1 P32_4_6.2 P32_4_6.3 P32_4_6.4 P32_4_7.1 P32_4_7.2 P32_4_7.3 P32_4_7.4 P32_4_8.1 P32_4_8.2 P32_4_8.3 P32_4_8.4 P32_5.1 P32_5.2 P32_5.3 P32_5.4 P32_6.1 P32_6.2 P32_6.3 P32_6.4 P32_7.1 P32_7.2 P32_7.3 P32_7.4 P32_8.1 P32_8.2 P32_8.3 P32_8.4 P32_9.1 P32_9.2 P32_9.3 P32_9.4 P32_10.1 P32_10.2 P32_10.3 P32_10.4 P32_11.1 P32_11.2 P32_11.3 P32_11.4 P32_12.1 P32_12.2 P32_12.3 P32_12.4 U2.1 U2.2 U2.3 U2.4 U2.5 U2.6 U2.7 U2.8 U2_1.1 U2_1.2 U2_1.3 U2_1.4 U2_1.5 U2_1.6 U2_1.7 U2_1.8 U2_1_1.1 U2_1_1.2 U2_1_1.3 U2_1_1.4 U2_1_1.5 U2_1_1.6 U2_1_1.7 U2_1_1.8 U2_1_2.1 U2_1_2.2 U2_1_2.3 U2_1_2.4 U2_1_2.5 U2_1_2.6 U2_1_2.7 U2_1_2.8 U2_1_3.1 U2_1_3.2 U2_1_3.3 U2_1_3.4 U2_1_3.5 U2_1_3.6 U2_1_3.7 U2_1_3.8 U2_1_4.1 U2_1_4.2 U2_1_4.3 U2_1_4.4 U2_1_4.5 U2_1_4.6 U2_1_4.7 U2_1_4.8 U2_1_5.1 U2_1_5.2 U2_1_5.3 U2_1_5.4 U2_1_5.5 U2_1_5.6 U2_1_5.7 U2_1_5.8 U2_1_6.1 U2_1_6.2 U2_1_6.3 U2_1_6.4 U2_1_6.5 U2_1_6.6 U2_1_6.7 U2_1_6.8 U2_1_7.1 U2_1_7.2 U2_1_7.3 U2_1_7.4 U2_1_7.5 U2_1_7.6 U2_1_7.7 U2_1_7.8 U2_1_8.1 U2_1_8.2 U2_1_8.3 U2_1_8.4 U2_1_8.5 U2_1_8.6 U2_1_8.7 U2_1_8.8 U2_2.1 U2_2.2 U2_2.3 U2_2.4 U2_2.5 U2_2.6 U2_2.7 U2_2.8 U2_2_1.1 U2_2_1.2 U2_2_1.3 U2_2_1.4 U2_2_1.5 U2_2_1.6 U2_2_1.7 U2_2_1.8 U2_2_2.1 U2_2_2.2 U2_2_2.3 U2_2_2.4 U2_2_2.5 U2_2_2.6 U2_2_2.7 U2_2_2.8 U2_2_3.1 U2_2_3.2 U2_2_3.3 U2_2_3.4 U2_2_3.5 U2_2_3.6 U2_2_3.7 U2_2_3.8 U2_2_4.1 U2_2_4.2 U2_2_4.3 U2_2_4.4 U2_2_4.5 U2_2_4.6 U2_2_4.7 U2_2_4.8 U2_2_5.1 U2_2_5.2 U2_2_5.3 U2_2_5.4 U2_2_5.5 U2_2_5.6 U2_2_5.7 U2_2_5.8 U2_2_6.1 U2_2_6.2 U2_2_6.3 U2_2_6.4 U2_2_6.5 U2_2_6.6 U2_2_6.7 U2_2_6.8 U2_2_7.1 U2_2_7.2 U2_2_7.3 U2_2_7.4 U2_2_7.5 U2_2_7.6 U2_2_7.7 U2_2_7.8 U2_2_8.1 U2_2_8.2 U2_2_8.3 U2_2_8.4 U2_2_8.5 U2_2_8.6 U2_2_8.7 U2_2_8.8 U2_3.1 U2_3.2 U2_3.3 U2_3.4 U2_3.5 U2_3.6 U2_3.7 U2_3.8 U2_3_1.1 U2_3_1.2 U2_3_1.3 U2_3_1.4 U2_3_1.5 U2_3_1.6 U2_3_1.7 U2_3_1.8 U2_3_2.1 U2_3_2.2 U2_3_2.3 U2_3_2.4 U2_3_2.5 U2_3_2.6 U2_3_2.7 U2_3_2.8 U2_3_3.1 U2_3_3.2 U2_3_3.3 U2_3_3.4 U2_3_3.5 U2_3_3.6 U2_3_3.7 U2_3_3.8 U2_3_4.1 U2_3_4.2 U2_3_4.3 U2_3_4.4 U2_3_4.5 U2_3_4.6 U2_3_4.7 U2_3_4.8 U2_3_5.1 U2_3_5.2 U2_3_5.3 U2_3_5.4 U2_3_5.5 U2_3_5.6 U2_3_5.7 U2_3_5.8 U2_3_6.1 U2_3_6.2 U2_3_6.3 U2_3_6.4 U2_3_6.5 U2_3_6.6 U2_3_6.7 U2_3_6.8 U2_3_7.1 U2_3_7.2 U2_3_7.3 U2_3_7.4 U2_3_7.5 U2_3_7.6 U2_3_7.7 U2_3_7.8 U2_3_8.1 U2_3_8.2 U2_3_8.3 U2_3_8.4 U2_3_8.5 U2_3_8.6 U2_3_8.7 U2_3_8.8 U2_4.1 U2_4.2 U2_4.3 U2_4.4 U2_4.5 U2_4.6 U2_4.7 U2_4.8 U2_4_1.1 U2_4_1.2 U2_4_1.3 U2_4_1.4 U2_4_1.5 U2_4_1.6 U2_4_1.7 U2_4_1.8 U2_4_2.1 U2_4_2.2 U2_4_2.3 U2_4_2.4 U2_4_2.5 U2_4_2.6 U2_4_2.7 U2_4_2.8 U2_4_3.1 U2_4_3.2 U2_4_3.3 U2_4_3.4 U2_4_3.5 U2_4_3.6 U2_4_3.7 U2_4_3.8 U2_4_4.1 U2_4_4.2 U2_4_4.3 U2_4_4.4 U2_4_4.5 U2_4_4.6 U2_4_4.7 U2_4_4.8 U2_4_5.1 U2_4_5.2 U2_4_5.3 U2_4_5.4 U2_4_5.5 U2_4_5.6 U2_4_5.7 U2_4_5.8 U2_4_6.1 U2_4_6.2 U2_4_6.3 U2_4_6.4 U2_4_6.5 U2_4_6.6 U2_4_6.7 U2_4_6.8 U2_4_7.1 U2_4_7.2 U2_4_7.3 U2_4_7.4 U2_4_7.5 U2_4_7.6 U2_4_7.7 U2_4_7.8 U2_4_8.1 U2_4_8.2 U2_4_8.3 U2_4_8.4 U2_4_8.5 U2_4_8.6 U2_4_8.7 U2_4_8.8 U2_5.1 U2_5.2 U2_5.3 U2_5.4 U2_5.5 U2_5.6 U2_5.7 U2_5.8 U2_6.1 U2_6.2 U2_6.3 U2_6.4 U2_6.5 U2_6.6 U2_6.7 U2_6.8 U2_7.1 U2_7.2 U2_7.3 U2_7.4 U2_7.5 U2_7.6 U2_7.7 U2_7.8 U2_8.1 U2_8.2 U2_8.3 U2_8.4 U2_8.5 U2_8.6 U2_8.7 U2_8.8 U2_9.1 U2_9.2 U2_9.3 U2_9.4 U2_9.5 U2_9.6 U2_9.7 U2_9.8 U2_10.1 U2_10.2 U2_10.3 U2_10.4 U2_10.5 U2_10.6 U2_10.7 U2_10.8 U2_11.1 U2_11.2 U2_11.3 U2_11.4 U2_11.5 U2_11.6 U2_11.7 U2_11.8 U2_12.1 U2_12.2 U2_12.3 U2_12.4 U2_12.5 U2_12.6 U2_12.7 U2_12.8 U3.1 U3.2 U3.3 U3.4 U3.5 U3.6 U3.7 U3.8 U3.9 U3.10 U3.11 U3.12 U3.13 U3.14 U3_1.1 U3_1.2 U3_1.3 U3_1.4 U3_1.5 U3_1.6 U3_1.7 U3_1.8 U3_1.9 U3_1.10 U3_1.11 U3_1.12 U3_1.13 U3_1.14 U3_1_1.1 U3_1_1.2 U3_1_1.3 U3_1_1.4 U3_1_1.5 U3_1_1.6 U3_1_1.7 U3_1_1.8 U3_1_1.9 U3_1_1.10 U3_1_1.11 U3_1_1.12 U3_1_1.13 U3_1_1.14 U3_1_2.1 U3_1_2.2 U3_1_2.3 U3_1_2.4 U3_1_2.5 U3_1_2.6 U3_1_2.7 U3_1_2.8 U3_1_2.9 U3_1_2.10 U3_1_2.11 U3_1_2.12 U3_1_2.13 U3_1_2.14 U3_1_3.1 U3_1_3.2 U3_1_3.3 U3_1_3.4 U3_1_3.5 U3_1_3.6 U3_1_3.7 U3_1_3.8 U3_1_3.9 U3_1_3.10 U3_1_3.11 U3_1_3.12 U3_1_3.13 U3_1_3.14 U3_1_4.1 U3_1_4.2 U3_1_4.3 U3_1_4.4 U3_1_4.5 U3_1_4.6 U3_1_4.7 U3_1_4.8 U3_1_4.9 U3_1_4.10 U3_1_4.11 U3_1_4.12 U3_1_4.13 U3_1_4.14 U3_2.1 U3_2.2 U3_2.3 U3_2.4 U3_2.5 U3_2.6 U3_2.7 U3_2.8 U3_2.9 U3_2.10 U3_2.11 U3_2.12 U3_2.13 U3_2.14 U3_2_1.1 U3_2_1.2 U3_2_1.3 U3_2_1.4 U3_2_1.5 U3_2_1.6 U3_2_1.7 U3_2_1.8 U3_2_1.9 U3_2_1.10 U3_2_1.11 U3_2_1.12 U3_2_1.13 U3_2_1.14 U3_2_2.1 U3_2_2.2 U3_2_2.3 U3_2_2.4 U3_2_2.5 U3_2_2.6 U3_2_2.7 U3_2_2.8 U3_2_2.9 U3_2_2.10 U3_2_2.11 U3_2_2.12 U3_2_2.13 U3_2_2.14 U3_2_3.1 U3_2_3.2 U3_2_3.3 U3_2_3.4 U3_2_3.5 U3_2_3.6 U3_2_3.7 U3_2_3.8 U3_2_3.9 U3_2_3.10 U3_2_3.11 U3_2_3.12 U3_2_3.13 U3_2_3.14 U3_2_4.1 U3_2_4.2 U3_2_4.3 U3_2_4.4 U3_2_4.5 U3_2_4.6 U3_2_4.7 U3_2_4.8 U3_2_4.9 U3_2_4.10 U3_2_4.11 U3_2_4.12 U3_2_4.13 U3_2_4.14 U3_3.1 U3_3.2 U3_3.3 U3_3.4 U3_3.5 U3_3.6 U3_3.7 U3_3.8 U3_3.9 U3_3.10 U3_3.11 U3_3.12 U3_3.13 U3_3.14 U3_3_1.1 U3_3_1.2 U3_3_1.3 U3_3_1.4 U3_3_1.5 U3_3_1.6 U3_3_1.7 U3_3_1.8 U3_3_1.9 U3_3_1.10 U3_3_1.11 U3_3_1.12 U3_3_1.13 U3_3_1.14 U3_3_2.1 U3_3_2.2 U3_3_2.3 U3_3_2.4 U3_3_2.5 U3_3_2.6 U3_3_2.7 U3_3_2.8 U3_3_2.9 U3_3_2.10 U3_3_2.11 U3_3_2.12 U3_3_2.13 U3_3_2.14 U3_3_3.1 U3_3_3.2 U3_3_3.3 U3_3_3.4 U3_3_3.5 U3_3_3.6 U3_3_3.7 U3_3_3.8 U3_3_3.9 U3_3_3.10 U3_3_3.11 U3_3_3.12 U3_3_3.13 U3_3_3.14 U3_3_4.1 U3_3_4.2 U3_3_4.3 U3_3_4.4 U3_3_4.5 U3_3_4.6 U3_3_4.7 U3_3_4.8 U3_3_4.9 U3_3_4.10 U3_3_4.11 U3_3_4.12 U3_3_4.13 U3_3_4.14 U3_4.1 U3_4.2 U3_4.3 U3_4.4 U3_4.5 U3_4.6 U3_4.7 U3_4.8 U3_4.9 U3_4.10 U3_4.11 U3_4.12 U3_4.13 U3_4.14 U3_4_1.1 U3_4_1.2 U3_4_1.3 U3_4_1.4 U3_4_1.5 U3_4_1.6 U3_4_1.7 U3_4_1.8 U3_4_1.9 U3_4_1.10 U3_4_1.11 U3_4_1.12 U3_4_1.13 U3_4_1.14 U3_4_2.1 U3_4_2.2 U3_4_2.3 U3_4_2.4 U3_4_2.5 U3_4_2.6 U3_4_2.7 U3_4_2.8 U3_4_2.9 U3_4_2.10 U3_4_2.11 U3_4_2.12 U3_4_2.13 U3_4_2.14 U3_4_3.1 U3_4_3.2 U3_4_3.3 U3_4_3.4 U3_4_3.5 U3_4_3.6 U3_4_3.7 U3_4_3.8 U3_4_3.9 U3_4_3.10 U3_4_3.11 U3_4_3.12 U3_4_3.13 U3_4_3.14 U3_4_4.1 U3_4_4.2 U3_4_4.3 U3_4_4.4 U3_4_4.5 U3_4_4.6 U3_4_4.7 U3_4_4.8 U3_4_4.9 U3_4_4.10 U3_4_4.11 U3_4_4.12 U3_4_4.13 U3_4_4.14 U3_5.1 U3_5.2 U3_5.3 U3_5.4 U3_5.5 U3_5.6 U3_5.7 U3_5.8 U3_5.9 U3_5.10 U3_5.11 U3_5.12 U3_5.13 U3_5.14 U3_6.1 U3_6.2 U3_6.3 U3_6.4 U3_6.5 U3_6.6 U3_6.7 U3_6.8 U3_6.9 U3_6.10 U3_6.11 U3_6.12 U3_6.13 U3_6.14 U3_7.1 U3_7.2 U3_7.3 U3_7.4 U3_7.5 U3_7.6 U3_7.7 U3_7.8 U3_7.9 U3_7.10 U3_7.11 U3_7.12 U3_7.13 U3_7.14 U3_8.1 U3_8.2 U3_8.3 U3_8.4 U3_8.5 U3_8.6 U3_8.7 U3_8.8 U3_8.9 U3_8.10 U3_8.11 U3_8.12 U3_8.13 U3_8.14